# Altium PCB Final_PCB.PcbDoc
Units mil, origin at the board's own origin, x right, y up, seen from the top; angles counter-clockwise.
Board outline 3510 x 2310 mil, 2 copper layers (Top Layer, Bottom Layer); 30 components, 29 nets, 99 pads, 0 vias.
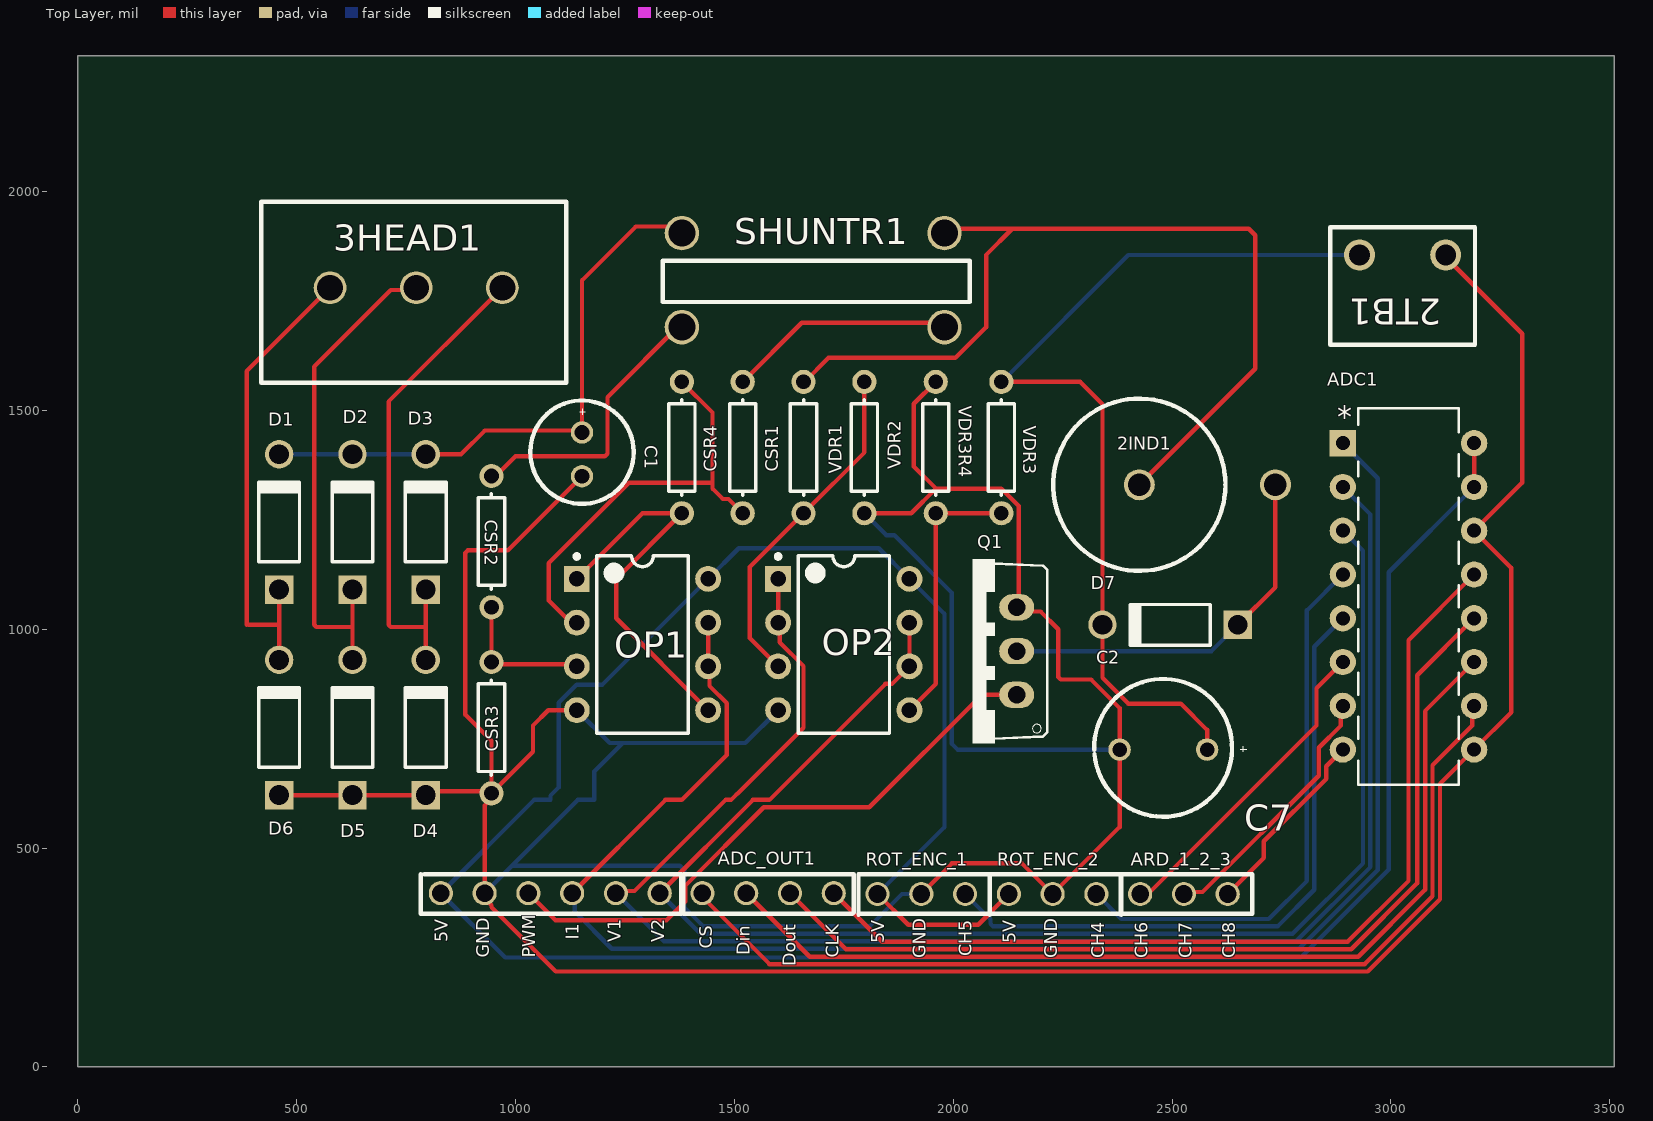
[diagram p0: Top Layer view]
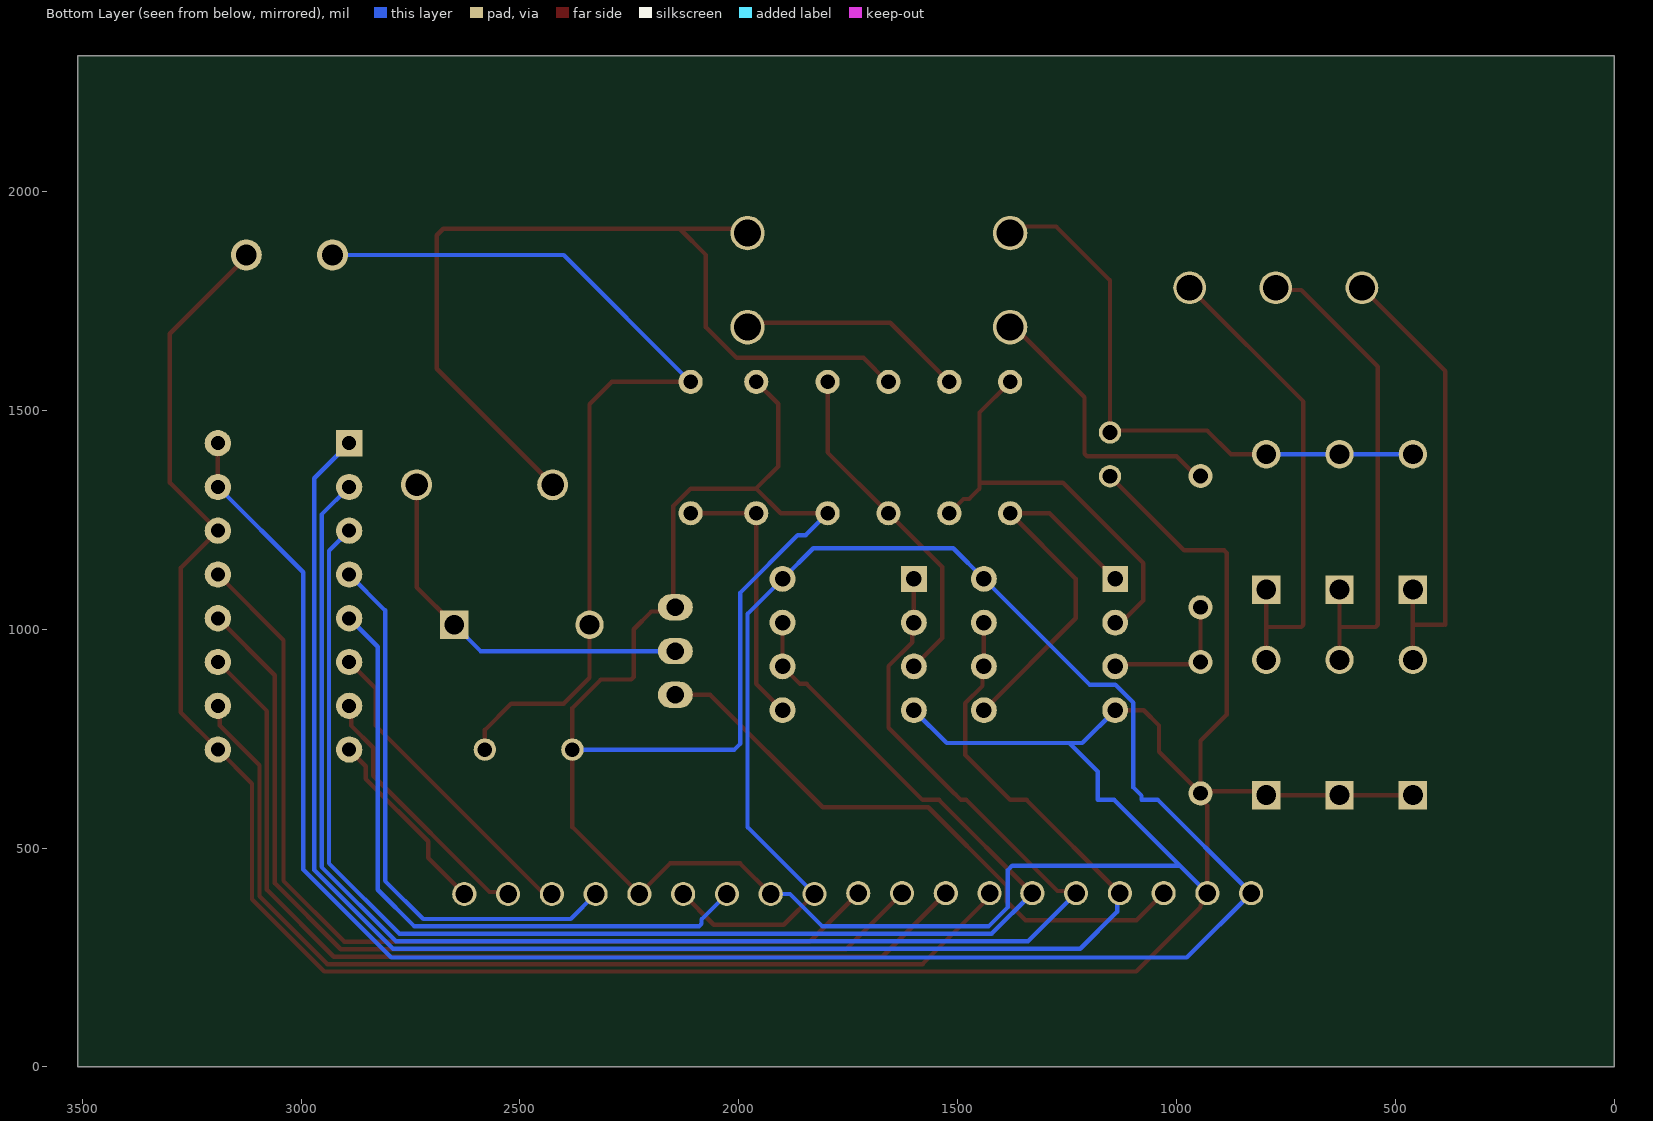
[diagram p1: Bottom Layer view, seen from below]

## Layer stack, top to bottom
Top Solder: solder mask 0.4, Solder Resist, Dk 3.5
Top Layer: signal copper 1.4
Dielectric 1: dielectric 12.6, FR-4, Dk 4.8
Bottom Layer: signal copper 1.4
Bottom Solder: solder mask 0.4, Solder Resist, Dk 3.5

## Board outline
0,0 3510,0 3510,2310 0,2310

## Design rules (kind name [scope] priority, off if disabled: settings)
AssemblyTestPointUsage [All] p1: valid=2
BoardOutlineClearance [All] p1: gap=10 ignorepadtopadclearanceinfootprint=FALSE
Clearance [All] p1: gap=7 ignorepadtopadclearanceinfootprint=FALSE except(0: Arc-Hole Track-Hole SMDPad-Hole THPad-Hole Via-Hole Fill-Hole Poly-Hole Region-Hole Text-Hole)
ComponentClearance [All] p1: gap=0 collisioncheckmode=3 verticalgap=0 showdistances=FALSE
FabricationTestPointUsage [All] p1: valid=2 allowmultiple=FALSE
FabricationTestPointUsage TestPointUsage [All] p2: valid=0 allowmultiple=FALSE
FabricationTestpoint Testpoint [All] p2: side=3 testpointundercomponent=TRUE minsize=40 maxsize=100 preferedsize=60 minholesize=0 maxholesize=40 preferedholesize=32 testpointgrid=1 allowsidetop=TRUE allowsidebottom=TRUE usegrid=TRUE gridtolerance=0.01
Height [All] p1: minheight=0 maxheight=2000 prefheight=500
HoleSize [All] p1: absolutevalues=TRUE maxlimit=250 minlimit=15 maxpercent=80.000 minpercent=20.000
MinimumAnnularRing MinimumAnnularRing_Vias [IsVia] p1: minimumring=5
MinimumAnnularRing [All] p2: minimumring=7
MinimumSolderMaskSliver [All] p1: minsoldermaskwidth=5
PolygonConnect [All] p1: connectstyle=Relief reliefconductorwidth=10 reliefentries=4 polygonreliefangle="90 Angle" airgapwidth=10
RoutingVias [All] p1: holewidth=25 width=50 viastyle="Through Hole" minholewidth=15 minwidth=50 maxholewidth=25 maxwidth=50
SilkToSilkClearance [All] p1: silktosilkclearance=0
SilkToSolderMaskClearance [All] p1: minsilkscreentomaskgap=5 clearancetoexposedcopper=FALSE
SilkToSolderMaskClearance SilkToCopperClearance [All] p2: minsilkscreentomaskgap=10 clearancetoexposedcopper=TRUE
SilkToSolderMaskClearance SilkscreenOverComponentPads [IsPad] p3: minsilkscreentomaskgap=10 clearancetoexposedcopper=TRUE
SolderMaskExpansion [All] p1: expansion=4
Width [All] p1: maxlimit=500 minlimit=7 preferedwidth=10
22 further rules are at their usual default settings.

## Components (designator, comment, footprint, x,y, rotation, side; value= is the part's Value field where it differs from the comment)
2IND1 "291 INDUCTOR" "3 CM INDUCTOR" 2425,1330 r0 top
2TB1 "2PINTERMINAL" "2 PIN TERMINAL BLOCK" 2928.15,1855 r0 top
3HEAD1 "3 PIN HEADER" "3 PIN HEADER" 970,1780 r180 top
4HEAD1 "4 PIN HEADER" "4 PIN HEADER" 827,396.97 r0 top
ADC1 "ADC1" PDIP16_300MC 3195,725 r0 top
ADC_OUT1 "Ard_4_Pin" ARD_4_PIN 1427,396.97 r0 top
ARD_1_2_3 "ARD 3 PIN HEADER" "ARD 3 PIN HEADER" 2427,395 r0 top
C1 "Cap Pol1" PCBComponent_1#1 1151.89,1449.53 r270 top value=100pF
C2 "Cap Pol1" PCBComponent_1#2 2580,725 r180 top value=100pF
CSR1 "CSR_R1" AXIAL-0.3 1519,1415 r90 top value=1k
CSR2 "CSR_R1" AXIAL-0.3 945,1200 r90 top value=1k
CSR3 "CSR_R2" AXIAL-0.3 945,775 r270 top value=100k
CSR4 "CSR_R2" AXIAL-0.3 1380,1415 r270 top value=100k
D1 "1N5817-T" DIOD-DO-41-P-2 460,1245 r90 top
D2 "1N5817-T" DIOD-DO-41-P-2 627.5,1245 r90 top
D3 "1N5817-T" DIOD-DO-41-P-2 795,1245 r90 top
D4 "1N5817-T" DIOD-DO-41-P-2 795,775.47 r90 top
D5 "1N5817-T" DIOD-DO-41-P-2 627.5,775.47 r90 top
D6 "1N5817-T" DIOD-DO-41-P-2 460,775.47 r90 top
D7 "1N5817-T" DIOD-DO-41-P-2 2495.47,1010 r180 top
OP1 "LM358AN" N08E 1290,965 r0 top
OP2 "LM358AN" N08E 1750,965 r0 top
Q1 "IRFZ48N" TO220BV_IRFZ48N(Primary) 2045,950 r90 top
ROT_ENC_1 "ARD 3 PIN HEADER" "ARD 3 PIN HEADER" 1827,395 r0 top
ROT_ENC_2 "ARD 3 PIN HEADER" "ARD 3 PIN HEADER" 2127,395 r0 top
SHUNTR1 "" SHUNT15.24 1380,1904.96 r0 top
VDR1 "V_DIVA1" AXIAL-0.3 1658,1415 r270 top value=200k
VDR2 "V_DIVB2" AXIAL-0.3 1797,1415 r270 top value=100k
VDR3 "V_DIVA2" AXIAL-0.3 2110,1415 r270 top value=200k
VDR3R4 "V_DIVB2" AXIAL-0.3 1960,1415 r90 top value=100k

## Footprints (in the part's own frame and the unit in brackets; to place one, negate y for a bottom-side part, rotate by r counter-clockwise, add the part's x,y. Pads: shape width x height; smd on the part's side, far side on the other; paste and mask are expansions set on the pad)
"2 PIN TERMINAL BLOCK" [mm] "2 PIN TERMINAL BLOCK"
  round 1.8 hole 1.2: 1(5,0) 2(0,0)
  silkscreen extent -1.7,-5.2 6.7,1.6
"3 CM INDUCTOR" [mm] "3 CM INDUCTOR"
  round 1.8 hole 1.3: 1(0,0) 2(7.9,0)
  silkscreen extent -5,-5 5,5
"3 PIN HEADER" [mm] "3 PIN HEADER"
  round 1.9 hole 1.5: 1(0,0) 2(5,0) 3(10,0)
  silkscreen extent -3.7,-5 14,5.5
"4 PIN HEADER" [mm] "4 PIN HEADER"
  round 1.4 hole 1.02: 1(0.06,0) 2(2.6,0) 3(5.14,0) 4(7.68,0) 5(10.22,0) 6(12.76,0)
  silkscreen extent -1.1,-1.2 14,1.1
"ARD 3 PIN HEADER" [mm] "3P IN HEADER"
  round 1.4 hole 1.02: 1(0,0) 2(2.54,0) 3(5.08,0)
  silkscreen extent -1.1,-1.2 6.5,1.15
ARD_4_PIN [mm] "4 PIN HEADER"
  round 1.4 hole 1.02: 1(0,0) 2(2.54,0) 3(5.08,0) 4(7.62,0)
  silkscreen extent -1.1,-1.2 8.77,1.1
AXIAL-0.3 [mm] "Axial Device, Thru-Hole; 2 Leads; 0.3 in Pin Spacing"
  round 1.4 hole 0.85: 1(-3.81,0) 2(3.81,0)
  silkscreen extent -2.77,-0.76 2.77,0.76
DIOD-DO-41-P-2 [mm] "THD, 2-Leads, Body 4.635x2.36mm, Pin Spacing 7.85mm"
  rect 1.65x1.65 hole 1.15: 1(-3.925,0)
  round 1.65 hole 1.15: 2(3.925,0)
  silkscreen extent -2.32,-1.18 2.32,1.18, body extent -4.36,-1.18 4.36,1.18, height 2.35
N08E [mm] "DIP, 8-Pin, Row Spacing 7.62 mm, Pitch 2.54 mm"
  rect 1.5x1.5 hole 0.9: 1(-3.81,3.81)
  round 1.5 hole 0.9: 2(-3.81,1.27) 3(-3.81,-1.27) 4(-3.81,-3.81) 5(3.81,-3.81) 6(3.81,-1.27) 7(3.81,1.27) 8(3.81,3.81)
  silkscreen extent -3.93,-5.15 2.65,5.23, body extent -3.6,-5.15 3.6,5.15, height 5.33
PCBComponent_1#1 [mm]
  round 1.3 hole 0.85: 1(0,0) 2(2.54,0)
  silkscreen extent -1.85,-3 4.14,3
PCBComponent_1#2 [mm]
  round 1.3 hole 0.85: 1(0,0) 2(5.08,0)
  silkscreen extent -2.3,-4.1 6.55,3.9
PDIP16_300MC [mil]
  rect 60x60 hole 32 mask+0: 1(-305,700)
  round 60 hole 32 mask+0: 2(-305,600) 3(-305,500) 4(-305,400) 5(-305,300) 6(-305,200) 7(-305,100) 8(-305,0) 9(-5,0) 10(-5,100) 11(-5,200) 12(-5,300) 13(-5,400) 14(-5,500) 15(-5,600) 16(-5,700)
  silkscreen extent -270,-80 -40,780, body extent -5,0 5,10, height 10
SHUNT15.24 [mm] "SHUNT RESISTER 15.24"
  round 2 hole 1.57: 1(0,0) 2(15.24,0) 3(0,-5.46) 4(15.24,-5.46)
  silkscreen extent -1.1,-4 16.7,-1.6
TO220BV_IRFZ48N(Primary) [mil]
  oval 60x80 hole 40: D(0,-100) G(-100,-100) S(100,-100)
  silkscreen extent -210,-170 210,0

## Part data
2IND1: library part 2IND?
2TB1: library part 2TB?
3HEAD1: library part 3HEAD?
4HEAD1: library part 4HEAD?
ADC1: library part MCP3008
ADC_OUT1: library part APIN?
ARD_1_2_3 ROT_ENC_1 ROT_ENC_2: library part ARD_3_PIN?
C1 C2: "Polarized Capacitor (Radial)", LatestRevisionDate=17-Jul-2002, LatestRevisionNote="Re-released for DXP Platform.", PackageDescription="Polarized Capacitor (Radial); 2 Leads", PackageReference=RB7.6-15, Published=8-Jun-2000, Publisher="Altium Limited"
CSR1 CSR2 CSR3 CSR4 VDR1 VDR2 VDR3 VDR3R4: library part Res1, "Resistor", LatestRevisionDate=17-Jul-2002, LatestRevisionNote="Re-released for DXP Platform.", PackageDescription="Axial Device, Thru-Hole; 2 Leads; 0.3 in Pin Spacing", PackageReference=AXIAL-0.3, Published=8-Jun-2000, Publisher="Altium Limited"
D1 D2 D3 D4 D5 D6 D7: library part CMP-2000-05521-1, "Schottky Barrier Rectifier, 1 A, 20 V, -65 to 125 degC, 2-Pin DO-41, RoHS, Tape and Reel", If - Forward Current=1A, Ifsm - Forward Surge Current=25A, Ir - Reverse Current=1000uA, Manufacturer=DiodesIncorporated, Maximum Operating Temperature=+125C, Minimum Operating Temperature=-65C, Operating Temperature Range=-65Cto+125C, Package / Case=DO-41, Package Description="2-Pin Through Hole Device, Body 4.635 x 2.36 mm, Pin Spacing 7.85 mm", Package Reference=DO-41-P-2, Vf - Forward Voltage=0.75Vat3A, Vrrm - Repetitive Reverse Voltage=20V, Brand=DiodesIncorporated, Configuration=Single, Datasheet URL=http://www.diodes.com/_files/datasheets/ds23001.pdf, Datasheet Version="Rev. 8-2, 05/2009", Factory Pack Quantity=5000, Height=2.72mm, Length=5.21mm, Manufacturer URL=http://www.diodes.com/, Mounting Style=ThroughHole, Mounting Technology=ThroughHole, Packaging=Reel, Product=SchottkyRectifiers, Product Category=SchottkyDiodes&Rectifiers, RoHS=True, Series=1N58, Technology=Si, Termination Style=ThroughHole, Type=SchottkyDiode, Unit Weight=0.010582oz, Width=2.72mm
OP1 OP2: library part CMP-0055-00164-2, "Low Power Dual Operational Amplifier, 8-pin MDIP", Manufacturer="National Semiconductor", PackageTopMarking=NSUZXYTTE#*LM*358AN, PowerWise=N, Code_JEDEC=MS-001-BA, ComponentLink1Description="LM358 Datasheet", ComponentLink1URL=http://www.national.com/ds/LM/LM358.pdf, ComponentLink2Description="LM358 Web Page", ComponentLink2URL=http://www.national.com/pf/LM/LM358.html, ComponentLink3Description="N08E Package Page", ComponentLink3URL=http://www.national.com/packaging/folders/n08e.html, CompType=Amplifiers, DatasheetVersion=Oct-2005, PackageDescription="MDIP, .365 x .250 x .130in, 8 Lead, .100in Pitch", PackageReference=N08E, PackageVersion="revG, May-2006", PinCount=8, RevisionNote="Component URLs added", RoHS=N
Q1: "55V Single N-Channel HEXFET Power MOSFET in a TO-220AB package", Package=None, Availability=Unavailable, MF="International Rectifier", MP=IRFZ48N, Price=None, SnapEDA_Link=https://www.snapeda.com/parts/IRFZ48N/International%20Rectifier/view-part/?ref=snap
SHUNTR1: library part SHUNTR?

## Nets (pads, with @x,y where several pads share a name; then routed paths per layer and width w, separated by ;. In a path a pad name is that pad's centre, name@x,y a point inside that pad or via, vN(x,y) a via of type N, cw(c..) or ccw(c..) an arc to the next point about the centre after c; other vN are vias at no path point)
"ARD 5V": 4HEAD1.1 ADC1.15 ADC1.16 OP1.8 OP2.8 ROT_ENC_1.1 ROT_ENC_2.1 | length 6094.5
  Top Layer w10: OP1.8 OP1.8@1450,1115 ; ROT_ENC_1.1 1897,325 2057,325 ROT_ENC_2.1 ; ADC1.15 ADC1.16
  Bottom Layer w10: ROT_ENC_1.1 1980,548 1980,1035 OP2.8 1830,1185 1510,1185 OP1.8 1198.47,873.47 1139.74,873.47 1098.47,832.2 1098.47,638.42 1080,619.94 1080,610 1042.39,610 4HEAD1.1 976.33,250 2794.04,250 2995,450.96 2995,1130 ADC1.15
"ARD GND": 2TB1.1 4HEAD1.2 ADC1.9 ADC1.14 C1.2 C2.2 CSR3.2 D4.1 D5.1 D6.1 OP1.4 OP2.4 Q1.S ROT_ENC_1.2 ROT_ENC_2.2 VDR2.2 VDR3R4.2 | length 11218.8
  Top Layer w10: D6.1 D5.1 D4.1 804.06,630 945,630 945,745 885,805 885,1174.14 890.86,1180 982.36,1180 C1.2 ; OP1.4 1075,815 1040,780 1040,720 CSR3.2 945,612.79 929.36,597.15 4HEAD1.2 929.36,384.76 945,369.12 945,365 1092,218 2947.04,218 3112,382.96 3112,647 ADC1.9 3275,810 3275,1140 ADC1.14 3300,1335 3300,1675 3125,1850 2TB1.1 ; VDR2.2 1904.06,1265 1960.39,1321.33 ; ROT_ENC_1.2 1997,465 2157,465 ROT_ENC_2.2 2380,548 C2.2 2380,820 2315,885 2245.86,885 2240,890.86 2240,1000 2199.57,1040.43 2164.57,1040.43 2155,1050 Q1.S 2149.56,1054.56 2149.56,1281.39 2109.61,1321.33 1960.39,1321.33 ; VDR3R4.2 1910,1515 1910,1371.72 1960.39,1321.33
  Bottom Layer w10: 4HEAD1.2 992.39,460 ; OP1.4 1215,740 1245,740 ; OP2.4 1525,740 1245,740 ; VDR2.2 1847,1215 1865,1215 1997,1083 1997,738 2010,725 C2.2 ; ROT_ENC_1.2 1882.94,395 1808.94,321 1429.37,321 1385.19,365.19 1385.19,449.81 1375,460 992.39,460 ; 992.39,460 1142.39,610 1180,610 1180,675 1245,740
CH4: ADC1.4 ROT_ENC_2.3 | length 1274.6
  Bottom Layer w10: ROT_ENC_2.3 2384,338 2721,338 2808,425 2808,1043 ADC1.4
CH5: ADC1.5 ROT_ENC_1.3 | length 1516.3
  Bottom Layer w10: ROT_ENC_1.3 2085,337 2085,326.86 2090.86,321 2741,321 2825,405 2825,960 ADC1.5
CH6: ADC1.6 ARD_1_2_3.1 | length 732.3
  Top Layer w10: ARD_1_2_3.1 2445,395 2830,780 2830,865 ADC1.6
CH7: ADC1.7 ARD_1_2_3.2 | length 602.6
  Top Layer w10: ARD_1_2_3.2 2531.56,399.56 2569.56,399.56 2835,665 2835,729.4 2885.6,780 2885.6,820.6 ADC1.7
CH8: ADC1.8 ARD_1_2_3.3 | length 438.9
  Top Layer w10: ARD_1_2_3.3 2709.6,477.6 2709.6,515.56 2852,657.96 2852,687 ADC1.8
"CURRENT 1": 4HEAD1.4 ADC1.1 OP1.6 OP1.7 | length 3801.1
  Top Layer w10: 4HEAD1.4 1342.39,610 1380,610 1482.5,712.5 1482.5,831.23 1443.26,870.47 1443.26,911.74 OP1.6 OP1.7
  Bottom Layer w10: 4HEAD1.4 1135.59,390.74 1135.59,354.41 1220,270 2790,270 2969.98,449.98 2969.98,1345.02 ADC1.1
Net2IND1_1: 2IND1.1 SHUNTR1.2 VDR1.1 | length 2114.6
  Top Layer w10: VDR1.1 1660,1565 1715,1620 2005,1620 2075,1690 2075,1854.96 2135,1914.96 ; SHUNTR1.2@1980,1914.96 2135,1914.96 ; 2IND1.1 2690,1595 2690,1900 2675.04,1914.96 2135,1914.96
Net2IND1_2: 2IND1.2 D7.1 Q1.D | length 885.5
  Top Layer w10: D7.1 2736.02,1096.02 2IND1.2
  Bottom Layer w10: Q1.D 2590,950 D7.1
NetADC1_10: ADC1.10 ADC_OUT1.1 | length 2278.9
  Top Layer w10: ADC_OUT1.1 1427,388 1580,235 2940,235 3095,390 3095,689.4 3185.6,780 3185.6,820.6 ADC1.10
NetADC1_11: ADC1.11 ADC_OUT1.2 | length 2240.8
  Top Layer w10: ADC_OUT1.2 1671.97,252 2925,252 3078,405 3078,813 ADC1.11
NetADC1_12: ADC1.12 ADC_OUT1.3 | length 2207.4
  Top Layer w10: ADC_OUT1.3 1754.97,269 2909,269 3060,420 3060,895 ADC1.12
NetADC1_13: ADC1.13 ADC_OUT1.4 | length 2178.7
  Top Layer w10: ADC_OUT1.4 1837.97,286 2901,286 3040,425 3040,975 ADC1.13
NetCSR1_1: CSR1.1 CSR4.1 OP1.2 | length 985.4
  Top Layer w10: OP1.2 1126.73,1015 1076.13,1065.6 1076.13,1151.13 1260,1335 1450,1335 ; CSR4.1 1450,1495 1450,1335 ; CSR1.1 1486.52,1297.48 1473.85,1297.48 1450,1321.33 1450,1335
NetCSR1_2: CSR1.2 SHUNTR1.4 | length 516.9
  Top Layer w10: CSR1.2 1654,1700 1890,1700 SHUNTR1.4@1980,1700
NetCSR2_1: CSR2.1 CSR3.1 OP1.3 | length 319.1
  Top Layer w10: CSR3.1 950,920 1135,920 OP1.3 ; CSR3.1@945,930 CSR2.1
NetCSR2_2: CSR2.2 SHUNTR1.3 | length 655.6
  Top Layer w10: CSR2.2 955,1350 1000,1395 1204.14,1395 1210,1400.86 1210,1530 SHUNTR1.3@1380,1700
NetCSR4_2: CSR4.2 OP1.1 OP1.5 | length 901.2
  Top Layer w10: OP1.1 1290,1265 CSR4.2 1230,1115 1230,1025 OP1.5
NetOP2_3: OP2.3 VDR1.2 VDR2.1 | length 785.4
  Top Layer w10: OP2.3 1535,980 1535,1142 VDR1.2 1797,1404 VDR2.1
NetOP2_5: OP2.5 VDR3.2 VDR3R4.1 | length 624.9
  Top Layer w10: OP2.5 1960,875 VDR3R4.1 VDR3.2
Output: 2TB1.2 C2.1 D7.2 VDR3.1 | length 2148.7
  Top Layer w10: VDR3.1 2290,1565 2340.94,1514.06 D7.2 2340.94,889.06 2400,830 2520,830 2580,770 C2.1
  Bottom Layer w10: VDR3.1 2400,1855 2TB1.2
"PHASE 1": 3HEAD1.3 D1.1 D6.2 | length 1071.5
  Top Layer w10: 385.62,1010.24 385.62,1589.32 3HEAD1.3@571.3,1775 ; 390.62,1010.24 460,1010.24 ; D6.2 460,1010.24 ; D1.1 460,1010.24
"PHASE 2": 3HEAD1.2 D2.1 D5.2 | length 1140.7
  Top Layer w10: D5.2 627.5,1005 ; D2.1 627.5,1005 ; 3HEAD1.2@768.15,1775 715,1775 540,1600 540,1010 545,1005 627.5,1005
"PHASE 3": 3HEAD1.1 D3.1 D4.2 | length 1118.2
  Top Layer w10: D4.2 795,1005 ; D3.1 795,1005 ; 3HEAD1.1@965,1775 710,1520 710,1010 715,1005 795,1005
PWM: 4HEAD1.3 Q1.G | length 1375.7
  Top Layer w10: 4HEAD1.3 1091.33,335 1345,335 1387.44,377.44 1387.44,413.35 1567.09,593 1808,593 2065,850 Q1.G
Vdc: C1.1 D1.2 D2.2 D3.2 SHUNTR1.1 | length 1337.8
  Top Layer w10: D3.2 875.47,1399.53 930,1454.06 1147.36,1454.06 C1.1 1151.89,1454.06 1151.89,1796.89 1275,1920 1290,1920 SHUNTR1.1@1375,1920
  Bottom Layer w10: D1.2 D2.2 D3.2
"VOLTAGE 1": 4HEAD1.5 ADC1.2 OP2.1 OP2.2 | length 3682.9
  Top Layer w10: 4HEAD1.5 1234.32,401.92 1271.92,401.92 1480,610 1492.21,610 1505.8,623.59 1506.59,623.59 1658,775 1658,915.73 1603.26,970.47 1603.26,1011.74 OP2.2 OP2.1
  Bottom Layer w10: 4HEAD1.5 1339.33,287 2782.96,287 2952.98,457.02 2952.98,1262.02 ADC1.2
"VOLTAGE 2": 4HEAD1.6 ADC1.3 OP2.6 OP2.7 | length 3376.1
  Top Layer w10: 4HEAD1.6 1542.39,610 1580,610 1845,875 1860,875 OP2.6 OP2.7
  Bottom Layer w10: 4HEAD1.6 1422.33,304 2774.98,304 2935.98,465 2935.98,1179.02 ADC1.3

## Silkscreen, mask and mechanical layers (free items; w line width, h text height)
Top Overlay:
  text "C7" at 2665,540 h60
  text "I1" at 1145,290 h29.53 r90
  text "5V" at 845,285 h29.53 r90
  text "V1" at 1240,285 h29.53 r90
  text "V2" at 1340,285 h29.53 r90
  text "5V" at 1842.64,283.03 h29.53 r90
  text "5V" at 2142.64,283.03 h29.53 r90
  text "CS" at 1450,270 h29.53 r90
  text "Din" at 1535,254.6 h29.53 r90
  text "CH5" at 2042.64,253.03 h29.53 r90
  text "GND" at 940,250 h29.53 r90
  text "PWM" at 1045,250 h29.53 r90
  text "CLK" at 1738,249.68 h29.53 r90
  text "GND" at 1937.64,248.03 h29.53 r90
  text "GND" at 2237.64,248.03 h29.53 r90
  text "CH4" at 2344.64,248.03 h29.53 r90
  text "CH6" at 2444.64,248.03 h29.53 r90
  text "CH7" at 2544.64,248.03 h29.53 r90
  text "CH8" at 2644.64,248.03 h29.53 r90
  text "Dout" at 1640,230 h29.53 r90
Mechanical 1:
  lines w5: 320,190 3375,190 3375,230 3375,2070 320,2070 320,190

## Text inside footprints (layer, text, board x,y; h text height)
ADC1: Top Overlay "*" at 2877.5,1460 h50; Mechanical 13 "*" at 2927.5,1400 h50